# Altium PCB PW_GEN_V2.PcbDoc (part 2 of 2)
Units mm, origin at the board's own origin, x right, y up, seen from the top; angles counter-clockwise.
Board outline 65 x 40.7 mm, 6 copper layers (Top Layer, Layer 2, Layer 3, Layer 4, Layer 5, Bottom Layer), stack 1.548 mm thick; 102 components, 54 nets, 409 pads, 516 vias.
Unrouted connection lines stored in the file: 64.
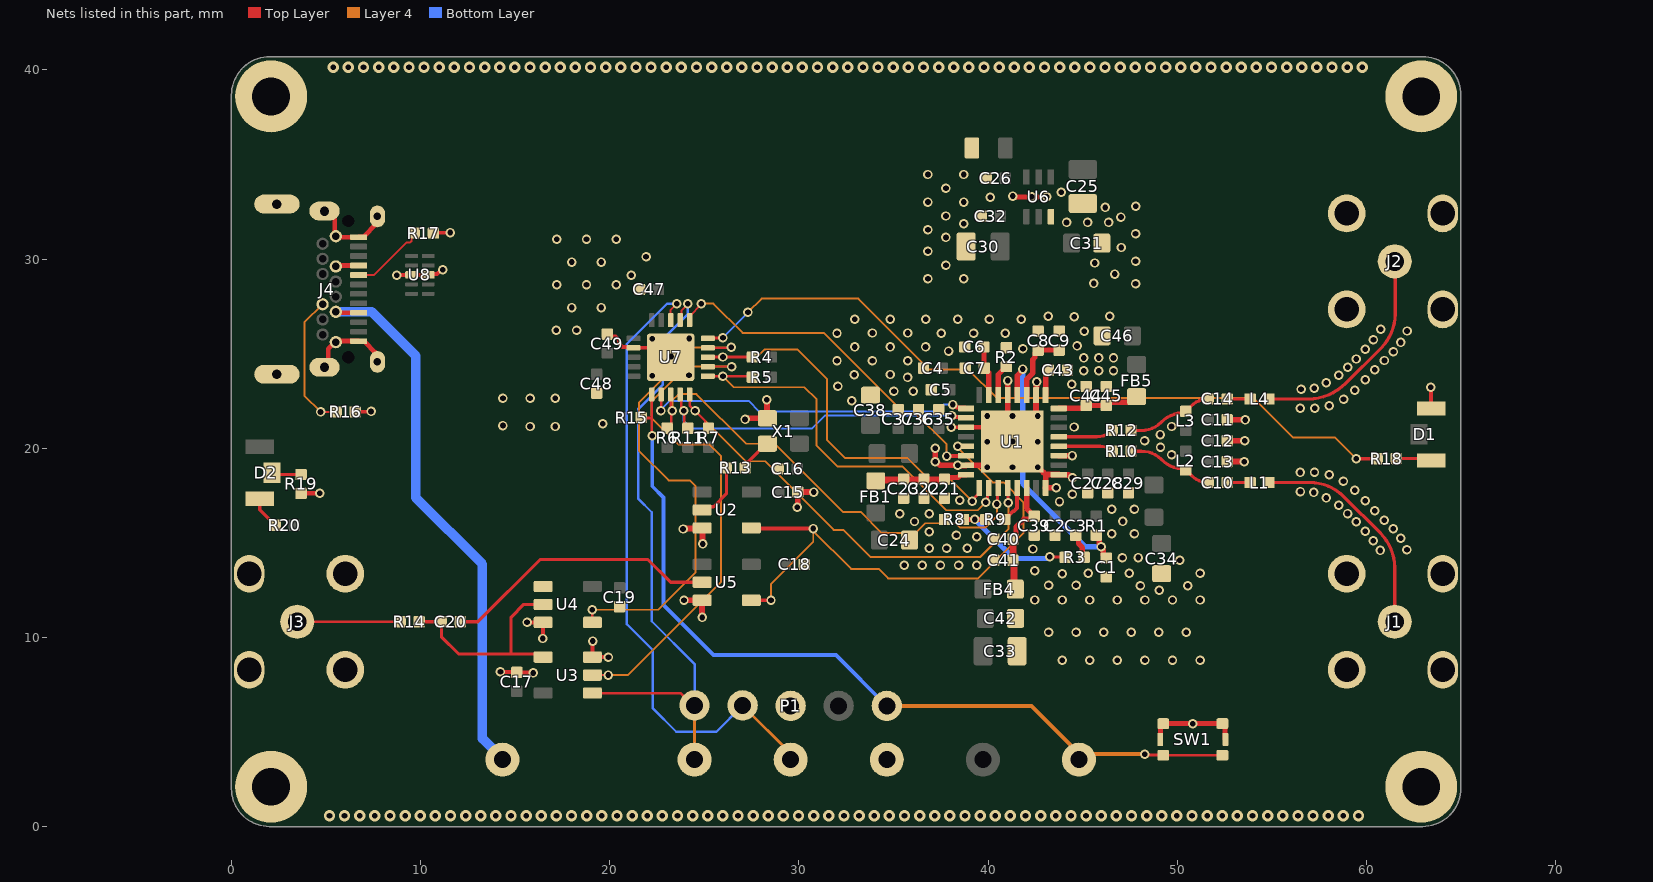
[diagram p6: the nets of this part, all layers, seen from the top]

## Via types
v1: diameter 0.5, hole 0.3, Top Layer to Bottom Layer, 225 vias
v2: diameter 0.5, hole 0.3, Top Layer to Bottom Layer, tented top, 152 vias
v3: diameter 0.6, hole 0.3, Top Layer to Bottom Layer, 138 vias
v4: diameter 0.5, hole 0.3, Top Layer to Bottom Layer, tented both sides, 1 vias

## Nets (pads, with @x,y where several pads share a name; then routed paths per layer and width w, separated by ;. In a path a pad name is that pad's centre, name@x,y a point inside that pad or via, vN(x,y) a via of type N, cw(c..) or ccw(c..) an arc to the next point about the centre after c; other vN are vias at no path point) (continued)
GND: C1.2 C2.2 C4.2 C5.2 C6.2 C7.2 C8.2 C9.2 C11.1 C12.1 C13.1 C15.1 C16.1 C17.1 C18.1 C19.1 C21.2 C22.2 C23.2 C24.2 C25.2 C26.1 C27.2 C28.2 C29.2 C30.2 C31.2 C32.1 C33.2 C34.2 C35.2 C36.2 C37.2 C38.2 C39.2 C40.2 C41.2 C42.2 C43.2 C44.2 C45.2 C46.2 C47.1 C48.1 C49.1 D1.C1 J1.2 J2.2 J3.2 J4.0 J4.A1 J4.A12 J4.B1 J4.B12 P1.3 pad.A5 R2.2 R8.1 R16.2 R17.2 R19.2 SW1.1 SW1.3 T4.1 U1.8 U1.9 U1.11 U1.18 U1.21 U1.27 U1.31 U1.33 U2.3 U3.3 U4.1 U4.3 U5.3 U6.3 U6.7 U7.17 U7.21 U8.3 U8.8 X1.2 | length 63.5
  Top Layer w0.203: R16.2@6.543,21.916 6.555,21.929 7.368,21.929 v1(7.381,21.942) ; v2(8.738,29.138) 8.747,29.148 9.517,29.148 U8.3@9.527,29.158 U8.8@10.401,29.158 10.453,29.21 10.876,29.21 11.094,29.428 v2(11.175,29.428) ; R17.2@10.677,31.375 10.69,31.388 11.562,31.388 v1(11.574,31.4) ; v1(14.224,8.177) 14.238,8.164 15.074,8.164 C17.1@15.088,8.15 ; C17.1@15.1,8.163 15.129,8.135 15.936,8.135 v1(15.951,8.119) ; v1@15.644,10.789 U4.3@16.48,10.789 v1@16.48,9.953 ; v1@19.08,9.792 U3.3@19.08,8.956 v1@19.916,8.956 ; C49.1@19.869,26.032 19.996,25.905 20.3,25.905 20.472,25.732 20.472,25.557 20.675,25.354 21.209,25.354 U7.17@21.257,25.306 22.722,25.306 U7.21@23.222,24.806 ; v2(38.046,21.109) 38.049,21.106 38.835,21.106 U1.27@38.839,21.103 ; U1.33@40.539,21.103 U1.33@41.039,20.603 ; v1(63.399,23.229) 63.424,23.204 D1.C1@63.424,22.101
  Top Layer w0.254: R19.2@3.683,17.61 3.688,17.615 4.669,17.615 v1(4.674,17.62) ; J4.0@4.536,24.278 4.774,24.278 5.119,24.623 5.119,25.261 J4.B1@5.492,25.635 ; J4.0@4.92,32.538 5.019,32.538 5.463,32.094 5.463,31.265 5.577,31.151 J4.A1@6.679,31.151 ; J4.B1@5.52,25.608 5.572,25.66 J4.A12@6.729,25.66 ; J4.A12@6.73,25.658 7.03,25.658 7.053,25.635 7.053,25.616 7.616,25.054 7.616,24.667 J4.0@7.72,24.563 ; J4.A1@6.73,31.158 7.03,31.158 7.053,31.181 7.053,31.241 7.616,31.803 7.616,32.261 J4.0@7.722,32.367 ; U1.27@38.839,21.103 U1.33@40.539,21.103 ; v1(41.3,33.329) 41.3,33.287 U6.7@42.672,33.287 ; SW1.3@49.1,4.602 49.123,4.625 49.123,5.3 SW1.1@49.263,5.439 v2(50.825,5.439) SW1.1@52.388,5.439 52.527,5.3 52.527,4.625 SW1.3@52.55,4.602
  Top Layer w0.305: v1(23.876,15.727) 23.904,15.756 24.856,15.756 U2.3@24.884,15.784 24.901,15.767 24.901,14.956 v1(24.917,14.94) ; v1(23.927,11.968) 23.932,11.963 24.857,11.963 24.877,11.943 24.877,11.069 v1(24.892,11.054) ; v1(27.153,21.518) 27.205,21.518 27.271,21.584 X1.2@28.335,21.584 28.315,21.603 28.315,22.54 v1(28.296,22.56) ; v1(29.921,16.87) 29.939,16.87 C15.1@29.939,17.683 v1(30.785,17.683) ; v1(37.211,19.994) v1(37.211,19.283) 37.264,19.283 37.454,19.093 v2(38.402,19.093) ; v2@38.402,19.075 U1.31@38.836,19.075 ; U1.31@38.836,19.1 U1.31@38.839,19.103 U1.33@40.039,19.103 ; v1(39.958,18.999) 39.958,19.022 U1.33@41.289,20.353 ; v2(41.046,23.574) 41.041,23.569 41.041,22.805 U1.21@41.039,22.803 41.039,20.603 U1.33@41.289,20.353 ; U1.33@42.539,21.603 U1.18@42.539,22.803 v2(42.567,23.503) ; U1.33@42.63,19.008 U1.33@42.63,19.011 ; U1.33@42.635,21.699 U1.33@41.289,20.353 ; U1.8@43.039,17.903 43.039,17.904 43.041,17.906 43.608,17.906 v2(43.612,17.91) ; U1.8@43.044,17.906 43.044,18.557 ; U1.11@43.739,19.603 44.45,19.603 v2(44.45,19.612) ; v2(44.465,18.429) 44.412,18.429 44.241,18.6 43.741,18.6 U1.9@43.739,18.603 43.736,18.605 43.036,18.605 42.929,18.712 U1.33@42.63,19.011 ; C13.1@52.638,19.29 53.537,19.29 v1(53.543,19.283) ; C12.1@52.638,20.395 53.562,20.395 v1(53.569,20.401) ; C11.1@52.638,21.499 53.588,21.499 v1(53.594,21.493) ; U1.33@41.289,20.353 U1.33@42.63,19.011
  other v1: 43.925,8.783 45.381,8.783 46.837,8.783 48.294,8.783 49.75,8.783 51.206,8.783 19.93,8.942 19.094,9.806 16.466,9.939 15.63,10.803 51.206,11.974 43.197,12.751 44.653,12.751 51.206,13.39 37.483,13.812 38.442,13.812 60.732,14.594 62.143,14.638 60.357,15.109 61.811,15.241 59.939,15.609 61.425,15.738 59.462,16.117 47.129,16.126 60.949,16.197 59.005,16.546 60.434,16.691 58.532,16.984 59.934,17.223 57.88,17.369 57.219,17.659 56.515,17.708 59.377,17.773 58.787,18.253 58.036,18.595 56.504,18.718 57.258,18.721 41.294,18.999 42.63,18.999 49.701,19.648 49.117,20.054 39.958,20.349 41.294,20.35 42.63,20.349 48.274,20.387 49.096,20.721 15.788,21.148 17.114,21.148 49.701,21.147 14.354,21.196 39.958,21.699 41.296,21.699 42.63,21.699 56.51,22.115 57.264,22.111 58.042,22.237 58.793,22.579 14.354,22.644 15.788,22.644 17.114,22.644 59.383,23.06 56.547,23.124 57.251,23.173 32.065,23.274 57.886,23.464 59.94,23.61 22.242,23.83 24.192,23.85 58.538,23.849 60.44,24.142 59.011,24.286 32.015,24.625 60.955,24.635 59.468,24.715 23.253,24.849 61.431,25.095 59.945,25.224 61.817,25.591 60.372,25.731 22.242,25.78 24.212,25.801 37.52,26.073 32.015,26.083 33.887,26.09 35.76,26.09 62.149,26.195 17.18,26.234 18.247,26.234 60.755,26.282 32.956,26.811 34.833,26.811 36.709,26.811 38.392,26.811 40.075,26.811 41.758,26.811 44.552,26.954 43.18,26.979 46.431,26.979 17.983,27.436 19.558,27.436 17.196,28.637 18.771,28.637 20.345,28.637 45.593,28.708 47.798,28.697 36.823,28.954 38.709,28.954 21.133,29.138 46.695,29.205 17.983,29.839 19.558,29.839 21.92,30.129 17.196,31.041 18.771,31.041 20.345,31.041 47.798,31.338 47.811,32.796 36.823,33.012 38.709,33.012 42.317,33.289 43.097,33.288 37.773,33.74 36.823,34.469 38.709,34.469
  other v2: 43.197,10.265 44.653,10.265 46.109,10.265 47.566,10.265 49.022,10.265 50.478,10.265 42.469,11.974 43.925,11.974 45.381,11.974 46.837,11.974 48.294,11.974 49.75,11.974 49.045,12.498 48.056,12.735 50.553,12.735 43.925,13.364 45.303,13.39 47.462,13.39 42.469,13.528 35.565,13.812 36.524,13.812 39.4,13.812 50.14,14.076 47.105,14.216 47.943,14.219 42.371,14.67 36.886,14.712 37.807,14.712 38.892,14.712 39.4,15.311 38.328,15.398 46.545,15.48 47.739,15.48 36.886,15.59 36.111,16.124 35.336,16.53 36.886,16.53 46.545,16.772 47.739,16.772 43.776,17.178 38.511,17.241 44.462,17.559 44.545,21.121 19.637,21.297 32.796,22.503 35.026,23.013 36.048,23.005 44.423,23.375 35.743,23.742 32.93,23.875 34.823,23.896 45.058,24.087 45.845,24.087 46.632,24.087 33.887,24.625 35.76,24.625 45.058,24.772 45.845,24.772 46.632,24.772 37.91,25.134 41.843,25.254 32.951,25.354 34.823,25.354 36.696,25.354 44.704,25.405 39.233,26.081 40.916,26.081 45.085,26.179 37.773,29.675 45.642,29.79 47.798,29.881 36.823,30.411 47.039,30.61 37.773,31.14 36.823,31.554 38.709,31.869 44.15,31.935 45.259,31.935 46.369,31.935 47.024,32.219 37.773,32.275 46.188,32.728 40.111,33.274 43.864,33.536
  other v3: 5.182,0.563 5.982,0.563 6.782,0.563 7.582,0.563 8.382,0.563 9.182,0.563 9.982,0.563 10.782,0.563 11.582,0.563 12.382,0.563 13.182,0.563 13.982,0.563 14.782,0.563 15.582,0.563 16.382,0.563 17.182,0.563 17.982,0.563 18.782,0.563 19.582,0.563 20.382,0.563 21.182,0.563 21.982,0.563 22.782,0.563 23.582,0.563 24.382,0.563 25.182,0.563 25.982,0.563 26.782,0.563 27.582,0.563 28.382,0.563 29.182,0.563 29.982,0.563 30.782,0.563 31.582,0.563 32.382,0.563 33.182,0.563 33.982,0.563 34.782,0.563 35.582,0.563 36.382,0.563 37.182,0.563 37.982,0.563 38.782,0.563 39.582,0.563 40.382,0.563 41.182,0.563 41.982,0.563 42.782,0.563 43.582,0.563 44.382,0.563 45.182,0.563 45.982,0.563 46.782,0.563 47.582,0.563 48.382,0.563 49.182,0.563 49.982,0.563 50.782,0.563 51.582,0.563 52.382,0.563 53.182,0.563 53.982,0.563 54.782,0.563 55.582,0.563 56.382,0.563 57.182,0.563 57.982,0.563 58.782,0.563 59.582,0.563 5.385,40.137 6.185,40.137 6.985,40.137 7.785,40.137 8.585,40.137 9.385,40.137 10.185,40.137 10.985,40.137 11.785,40.137 12.585,40.137 13.385,40.137 14.185,40.137 14.985,40.137 15.785,40.137 16.585,40.137 17.385,40.137 18.185,40.137 18.985,40.137 19.785,40.137 20.585,40.137 21.385,40.137 22.185,40.137 22.985,40.137 23.785,40.137 24.585,40.137 25.385,40.137 26.185,40.137 26.985,40.137 27.785,40.137 28.585,40.137 29.385,40.137 30.185,40.137 30.985,40.137 31.785,40.137 32.585,40.137 33.385,40.137 34.185,40.137 34.985,40.137 35.785,40.137 36.585,40.137 37.385,40.137 38.185,40.137 38.985,40.137 39.785,40.137 40.585,40.137 41.385,40.137 42.185,40.137 42.985,40.137 43.785,40.137 44.585,40.137 45.385,40.137 46.185,40.137 46.985,40.137 47.785,40.137 48.585,40.137 49.385,40.137 50.185,40.137 50.985,40.137 51.785,40.137 52.585,40.137 53.385,40.137 54.185,40.137 54.985,40.137 55.785,40.137 56.585,40.137 57.385,40.137 58.185,40.137 58.985,40.137 59.785,40.137
ICSPCLK: P1.5 T2.1 U3.1 U7.12 | length 33.1
  Top Layer w0.102: U7.12@23.722,26.806 23.789,26.873 23.789,27.27 24.129,27.61 v2(24.129,27.641)
  Top Layer w0.127: U3.1@19.08,7.056 19.639,7.056 23.735,7.056 24.385,6.405 P1.5@24.486,6.405
  Layer 4 w0.152: T2.1@24.486,3.535 P1.5@24.486,6.405
  Bottom Layer w0.127: v2(24.129,27.641) 24.129,27.089 22.809,25.768 22.809,23.372 21.514,22.077 21.514,17.323 22.224,16.613 22.224,10.852 24.486,8.59 P1.5@24.486,6.405
ICSPDAT: P1.4 T3.1 U7.13 | length 34.1
  Top Layer w0.102: U7.13@23.222,26.806 23.222,27.318 v2@23.539,27.635
  Layer 4 w0.152: P1.4@27.026,6.405 29.566,3.865 T3.1@29.566,3.535
  Bottom Layer w0.127: v2(23.539,27.641) 23.039,27.641 20.9,25.502 20.9,10.702 22.281,9.321 22.281,6.24 23.513,5.008 25.642,5.008 27.026,6.392 P1.4@27.026,6.405
NetC3_2: C3.2 R3.2 | length 1.4
  Top Layer w0.279: C3.2@44.628,15.404 44.78,15.252 44.78,14.957 44.985,14.752 44.985,14.32 R3.2@45.077,14.227
NetC10_1: C10.1 L1.2 | length 1.2
  Top Layer w0.171: C10.1@52.643,18.185 L1.2@53.853,18.185
NetC10_2: C10.2 L2.2 R10.2 | length 4.6
  Top Layer w0.171: R10.2@47.559,19.844 48.112,19.844 cw(c48.112,18.378) 49.149,19.415 ccw(c50.424,20.69) 50.424,18.887 50.76,18.551 ccw(c51.643,19.433) C10.2@51.643,18.185
NetC14_1: C14.1 L4.2 | length 1.2
  Top Layer w0.171: C14.1@52.643,22.604 L4.2@53.853,22.604
NetC14_2: C14.2 L3.1 R12.2 | length 4.5
  Top Layer w0.171: R12.2@47.559,20.936 48.112,20.936 ccw(c48.112,22.403) 49.149,21.366 cw(c50.424,20.091) L3.1@50.424,21.894 ; L3.1@50.448,21.945 50.728,22.225 cw(c51.643,21.311) C14.2@51.643,22.604
NetC20_1: C20.1 U5.2 | length 14.6
  Top Layer w0.171: C20.1@12.1,10.825 13.03,10.825 16.32,14.115 22.015,14.115 23.222,12.908 U5.2@24.862,12.908
NetC20_2: C20.2 R14.2 U3.4 U4.2 | length 11.7
  Top Layer w0.171: R14.2@9.923,10.825 C20.2@11.1,10.825 11.1,10.038 12.019,9.119 14.757,9.119 14.783,9.144 ; U3.4@16.48,8.956 16.317,9.119 14.808,9.119 14.783,9.144 ; U4.2@16.48,11.739 15.448,11.739 14.783,11.074 14.783,9.144
NetD1_A: D1.A R18.2 | length 2.1
  Top Layer w0.171: R18.2@61.584,19.451 63.324,19.451 D1.A@63.424,19.351
  Top Layer w0.203: D1.A@63.424,19.351 D1.A@63.682,19.351
NetD2_C1: D2.C1 R20.1 | length 1.7
  Top Layer w0.171: D2.C1@1.499,17.324 1.499,16.746 R20.1@2.319,15.926
NetD2_C2: D2.C2 R19.1 | length 1.6
  Top Layer w0.171: D2.C2@2.149,18.699 2.238,18.61 R19.1@3.683,18.61
NetJ1_1: J1.1 L1.1 | length 11.9
  Top Layer w0.171: L1.1@54.853,18.185 57.006,18.185 cw(c57.006,15.645) 58.802,17.441 60.751,15.492 cw(c58.955,13.696) 61.495,13.696 61.495,11.181 J1.1@61.85,10.825
NetJ2_1: J2.1 L4.1 | length 11.7
  Top Layer w0.171: L4.1@54.853,22.604 55.067,22.604 56.924,22.604 ccw(c56.924,25.405) 58.905,23.425 60.776,25.297 ccw(c58.98,27.093) 61.52,27.093 J2.1@61.52,29.875
NetJ3_1: J3.1 R14.1 | length 5.4
  Top Layer w0.127: J3.1@3.556,10.825 R14.1@8.923,10.825
NetJ4_A5: J4.A5 R17.1 | length 4
  Top Layer w0.102: J4.A5@6.73,29.158 7.543,29.158 9.262,30.877 9.456,30.877 9.51,30.931 9.51,31.208 R17.1@9.677,31.375
NetJ4_B5: J4.B5 R16.1 | length 7.3
  Top Layer w0.102: v1(4.714,21.916) R16.1@5.543,21.916
  Layer 4 w0.102: v1(4.714,21.916) 3.861,22.769 3.861,26.648 J4.B5@4.82,27.608
NetR2_1: R2.1 U1.22 | length 1.7
  Top Layer w0.279: U1.22@40.539,22.803 40.539,23.888 R2.1@40.97,24.319
NetR3_1: R3.1 R8.2 R9.1 | length 6.9
  Top Layer w0.152: v2(43.256,14.253) 44.052,14.253 R3.1@44.077,14.227
  Top Layer w0.279: R8.2@38.702,16.234 v2(39.294,16.234) R9.1@39.886,16.234
  Bottom Layer w0.279: v2(39.294,16.234) 41.361,14.166 43.17,14.166 v2(43.256,14.253)
NetR13_1: R13.1 X1.3 | length 1.8
  Top Layer w0.171: R13.1@27.17,18.953 27.338,19.121 27.338,19.307 27.424,19.393 27.424,19.398 28.26,20.234 X1.3@28.335,20.234
PRI_REF: R13.2 U2.2 | length 3
  Top Layer w0.171: U2.2@24.884,16.734 25.057,16.907 25.488,16.907 26.17,17.589 R13.2@26.17,18.953
REFIN: U1.29 U2.4 U5.4 | length 29.1
  Top Layer w0.171: U5.4@27.462,11.958 27.467,11.963 28.519,11.963 v1(28.524,11.968) ; U2.4@27.484,15.753 U2.4@27.484,15.784
  Top Layer w0.203: U2.4@27.484,15.753 v1(30.759,15.753) ; v2@38.405,20.106 38.835,20.106 U1.29@38.839,20.103
  Layer 4 w0.102: v1(28.524,11.968) 28.524,12.806 30.759,15.041 v1@30.759,15.62 ; v1@30.627,15.753 v1@30.759,15.62 ; v2(38.405,20.096) 38.405,20.031 40.245,18.191 40.818,18.191 41.885,17.124 41.885,15.534 39.471,13.121 34.712,13.121 34.214,13.619 32.761,13.619 v1@30.759,15.62
RF_CE: R7.1 U1.4 U7.5 | length 24.7
  Top Layer w0.127: U7.5@24.222,22.806 24.222,22.264 v1(24.511,21.976) 25.038,21.449 25.038,21.238 R7.1@25.222,21.053
  Top Layer w0.152: U1.4@41.039,17.903 41.055,17.886 41.055,17.141 v2(41.072,17.124)
  Layer 4 w0.102: v1(24.511,21.976) 27.178,19.309 28.209,19.309 31.836,15.681 32.35,15.681 33.775,14.256 39.6,14.256 41.072,15.727 v2(41.072,17.124)
RF_CLK: R4.1 U1.1 U7.8 | length 21.7
  Top Layer w0.152: U7.8@25.222,24.806 25.229,24.813 v1@25.977,24.813 ; v1(25.984,24.821) R4.1@27.542,24.82 ; v2@39.167,17.25 39.167,17.256 39.539,17.628 U1.1@39.539,17.903
  Layer 4 w0.102: v1(25.984,24.821) 27.788,24.821 28.178,25.211 29.935,25.211 31.496,23.65 31.496,20.42 32.429,19.486 35.738,19.486 36.805,18.42 37.946,18.42 v2(39.167,17.199)
RF_LE: R6.1 U1.3 U7.3 | length 24.8
  Top Layer w0.127: R6.1@23.038,21.053 23.242,21.258 23.242,21.909 v1(23.309,21.976) ; v1@23.222,21.976 U7.3@23.222,22.806
  Top Layer w0.152: v2(40.463,17.046) 40.501,17.084 40.501,17.865 U1.3@40.539,17.903
  Layer 4 w0.102: v1(23.309,21.976) 23.309,22.526 23.647,22.865 24.586,22.865 27.215,20.235 28.713,20.235 32.317,16.631 33.259,16.631 34.366,15.524 36.17,15.524 36.678,16.032 38.29,16.032 38.519,15.803 39.86,15.803 40.463,16.406 v2(40.463,17.046)
RF_LOCK: U1.25 U7.2 | length 17.7
  Top Layer w0.127: v1(22.708,21.976) 22.722,21.976 U7.2@22.722,22.806
  Top Layer w0.203: v2(38.125,22.306) 38.197,22.306 38.351,22.151 38.79,22.151 U1.25@38.839,22.103
  Bottom Layer w0.102: v1(22.708,21.976) 22.708,22.034 23.171,22.498 27.337,22.498 27.904,21.931 37.272,21.931 37.647,22.306 v2(38.125,22.306)
RF_MUXOUT: U1.30 U7.11 | length 18.8
  Top Layer w0.102: U7.11@24.222,26.771 24.222,26.987 24.841,27.606 v2(24.841,27.641)
  Top Layer w0.203: v1(37.812,19.585) 37.821,19.594 38.83,19.594 U1.30@38.839,19.603
  Layer 4 w0.102: v2(24.841,27.641) 25.475,27.641 27.026,26.09 31.327,26.09 35.561,21.856 36.163,21.856 37.812,20.206 v1(37.812,19.585)
RF_PDBRF: R11.2 U1.26 U7.4 | length 18
  Top Layer w0.127: U7.4@23.722,22.806 23.774,22.806 23.774,21.95 v1@23.887,21.951 ; v1(23.91,21.976) 23.932,21.954 23.932,21.252 R11.2@24.13,21.053
  Top Layer w0.203: v2(38.074,21.709) 38.154,21.709 38.213,21.651 38.79,21.651 U1.26@38.839,21.603
  Bottom Layer w0.102: v1(23.91,21.976) 23.91,21.442 24.321,21.031 30.692,21.031 31.394,21.733 38.05,21.733 v2(38.074,21.709)
RF_SDO: R5.1 U1.2 U7.6 | length 21.6
  Top Layer w0.127: U7.6@25.222,23.806 v1@25.957,23.806 ; v1(25.984,23.806) 27.489,23.806 R5.1@27.542,23.754
  Top Layer w0.152: v2@39.878,17.123 39.878,17.217 39.965,17.304 39.965,17.829 U1.2@40.039,17.903
  Layer 4 w0.102: v1(25.984,23.806) 26.568,23.223 30.291,23.223 30.937,22.576 30.937,20.133 32.049,19.021 35.492,19.021 37.795,16.718 39.453,16.718 v2(39.873,17.138)
RFOUTA+: R10.1 U1.12 | length 2.9
  Top Layer w0.171: U1.12@43.739,20.103 45.935,20.103 cw(c45.935,19.221) R10.1@46.559,19.844
RFOUTA-: R12.1 U1.13 | length 2.9
  Top Layer w0.171: U1.13@43.739,20.603 45.753,20.603 ccw(c45.753,21.742) R12.1@46.559,20.936
SDVDD: C21.1 C22.1 C23.1 FB1.2 U1.32 | length 5
  Top Layer w0.279: C21.1@37.694,18.359 37.786,18.452 38.413,18.452 38.553,18.592 38.828,18.592 U1.32@38.839,18.603
  Top Layer w0.381: FB1.2@34.061,18.278 34.087,18.278 34.112,18.278 34.138,18.278 34.163,18.278 34.188,18.278 34.214,18.278 34.239,18.278 34.265,18.278 34.29,18.278 34.331,18.319 C23.1@35.535,18.319 ; C23.1@35.535,18.359 C23.1@35.535,18.319 ; C21.1@37.694,18.359 37.653,18.319 36.614,18.319 C23.1@35.535,18.319
STATUS_LED: R18.1 U7.10 | length 39.8
  Top Layer w0.102: v2(25.984,25.836) v2@26.004,25.856
  Top Layer w0.152: U7.10@25.222,25.806 25.237,25.821 v2@25.969,25.821
  Top Layer w0.171: v1(59.467,19.438) 59.474,19.444 60.577,19.444 R18.1@60.584,19.451
  Layer 4 w0.102: v2(25.984,25.836) v2@26.005,25.857 ; v1(27.305,27.183) 28.03,27.907 33.151,27.907 36.903,24.155 38.964,24.155 40.462,22.657 54.026,22.657 56.109,20.574 58.331,20.574 v1(59.467,19.438)
  Bottom Layer w0.102: v2(25.984,25.836) 27.305,27.157 v1(27.305,27.183)
SW: R9.2 U1.5 | length 2
  Top Layer w0.203: R9.2@40.886,16.234 41.315,16.663 41.364,16.663 41.539,16.838 U1.5@41.539,17.903
SYNC_IN: U4.4 U7.9 | length 25.1
  Top Layer w0.102: U7.9@25.222,25.306 25.224,25.304 26.415,25.304 v1@26.416,25.303
  Top Layer w0.127: v1(19.075,11.46) 19.075,10.794 U4.4@19.08,10.789
  Layer 4 w0.102: v1(19.075,11.46) 22.56,11.46 24.536,13.437 24.536,17.988 24.232,18.293 23.107,18.293 21.55,19.849 21.55,22.418 24.461,25.329 v1(26.416,25.329)
SYNC_OUT: U3.2 U7.7 | length 27.1
  Top Layer w0.102: U3.2@19.08,8.006 v1(19.914,8.006) ; U7.7@25.222,24.306 25.238,24.322 26.425,24.322 v1@26.441,24.338
  Layer 4 w0.102: v1(19.914,8.006) 20.955,8.006 25.883,12.933 25.883,19.563 25.248,20.198 23.622,20.198 22.2,21.62 22.2,22.458 24.054,24.312 v1(26.441,24.314) v1(26.441,24.314)
TEMP: C8.1 C9.1 U1.19 | length 3.8
  Top Layer w0.279: U1.19@42.039,22.803 42.049,22.813 42.049,23.663 42.367,23.981 42.367,24.692 42.486,24.811 42.486,25.022 42.659,25.195 43.746,25.195 C9.1@43.759,25.183
VBUS: F1.1 J4.A4 J4.A9 J4.B4 J4.B9 T1.1 | length 31.3
  Top Layer w0.254: J4.B9@5.473,29.62 5.512,29.659 J4.A4@6.73,29.658 ; J4.B4@5.52,27.208 5.565,27.163 J4.A9@7.048,27.163
  Bottom Layer w0.508: J4.B4@5.52,27.208 7.421,27.208 9.754,24.875 9.754,17.378 13.263,13.869 13.263,4.645 14.326,3.582 T1.1@14.326,3.535
VCCO: C43.1 C44.1 C45.1 FB5.2 U1.16 U1.17 | length 5.8
  Top Layer w0.279: U1.17@43.039,22.803 43.049,22.813 43.049,23.97 C43.1@43.199,24.12 ; U1.16@43.739,22.103 43.749,22.113 45.038,22.113 C44.1@45.187,22.262 C45.1@46.253,22.262 46.414,22.422 47.551,22.422 FB5.2@47.854,22.724
VCOM: C6.1 C7.1 U1.23 | length 2.7
  Top Layer w0.279: C6.1@39.768,25.352 39.781,25.34 39.781,24.248 C7.1@39.794,24.235 40.039,23.99 U1.23@40.039,22.803
VP: C39.1 C40.1 C41.1 FB4.2 U1.6 | length 6.3
  Top Layer w0.279: C41.1@41.318,14.075 C41.1@41.378,14.014 ; C40.1@41.318,15.192 41.478,15.353 41.478,15.827 41.894,16.243 42.283,16.243 C39.1@42.443,16.404 42.039,16.808 U1.6@42.039,17.903
  Top Layer w0.381: C41.1@41.318,14.075 C40.1@41.318,15.192 ; C41.1@41.378,14.014 41.378,12.612 FB4.2@41.439,12.551
VTUNE: C1.1 R1.2 U1.20 | length 14.5
  Top Layer w0.279: U1.20@41.539,22.803 41.539,23.831 41.834,24.126 v1(41.834,24.185) ; R1.2@45.72,15.404 45.88,15.243 45.88,14.939 45.974,14.846 v4(45.974,14.786) 45.974,14.726 46.093,14.607 46.093,14.354 C1.1@46.253,14.194
  Bottom Layer w0.279: v1(41.834,24.185) 41.834,18.177 41.861,18.15 41.861,18.087 45.161,14.786 v4(45.974,14.786)
~MCLR: P1.1 R15.1 SW1.2 T6.1 U7.1 | length 45.4
  Top Layer w0.152: R15.1@21.658,21.62 21.684,21.595 22.222,21.595 ; U7.1@22.222,22.806 22.222,21.595 ; v1(22.248,20.655) 22.222,20.681 22.222,21.595 ; v1(48.286,3.813) 48.31,3.789 49.239,3.789 SW1.2@49.263,3.765 52.152,3.765 52.172,3.746 52.172,3.637 52.3,3.765 SW1.2@52.388,3.765
  Layer 4 w0.203: P1.1@34.646,6.38 42.291,6.38 44.806,3.865 T6.1@44.806,3.535 45.11,3.839 48.26,3.839 v1(48.286,3.813)
  Bottom Layer w0.203: v1(22.248,20.655) 22.248,17.986 22.835,17.399 22.835,11.709 25.476,9.068 31.958,9.068 P1.1@34.646,6.38
pads on no net: C1.0 C2.0 C3.0 C4.0 C5.0 C6.0 C7.0 C8.0 C9.0 C10.0 C11.0 C12.0 C13.0 C14.0 C15.0 C16.0 C17.0 C18.0 C19.0 C20.0 C21.0 C22.0 C23.0 C24.0 C25.0 C26.0 C27.0 C28.0 C29.0 C30.0 C31.0 C32.0 C33.0 C34.0 C35.0 C36.0 C37.0 C38.0 C39.0 C40.0 C41.0 C42.0 C43.0 C44.0 C45.0 C46.0 C47.0 C48.0 C49.0 D1.C2 FB1.0 FB2.0 FB3.0 FB4.0 FB5.0 J4.1 J4.A2 J4.A3 J4.A8 J4.A10 J4.A11 J4.B2 J4.B3 J4.B8 J4.B10 J4.B11 L1.0 L2.0 L3.0 L4.0 R1.0 R2.0 R3.0 R4.0 R5.0 R6.0 R7.0 R8.0 R9.0 R10.0 R11.0 R12.0 R13.0 R14.0 R15.0 R16.0 R17.0 R18.0 R19.0 R20.0 U1.14 U1.15 U2.0 U3.0 U4.0 U5.0 U6.2 U6.5 U8.1 U8.2 U8.9 U8.10

## Polygon pours and split planes (outlines as drawn)
GND on Top Layer "Top Layer-GND" (solid, pour order 66): 61.519,29.388 61.519,27.113 cw(c58.979,27.112) 60.775,25.316 58.808,23.35 cw(c57.012,25.146) 57.012,22.606 56.693,22.606 52.347,22.606 52.342,22.128 52.138,22.128 52.138,18.75 52.335,18.75 52.356,18.185 57.006,18.185 cw(c57.006,15.645) 58.802,17.441 60.751,15.492 cw(c59.02,13.761) 61.468,13.761 61.468,11.709 61.68,11.497 ccw(c62.027,11.844) 62.027,11.354 62.165,11.492 ccw(c61.211,12.446) 62.56,12.446 ccw(c62.499,12.507) 62.586,12.507 62.586,14.427 ccw(c60.746,14.427) 62.047,15.728 59.367,18.408 ccw(c57.571,16.612) 57.571,19.152 55.042,19.152 55.042,21.59 57.546,21.59 ccw(c57.546,24.13) 59.342,22.334 62.044,25.036 ccw(c60.613,26.467) 62.636,26.467 cw(c63.25,26.467) 62.816,26.9 63.017,27.102 63.017,29.388
GND on Top Layer "NONET_L01_P-001" (solid, pour order 61): 47.559,20.936 48.112,20.936 ccw(c48.112,22.403) 49.149,21.366 cw(c50.424,20.091) 50.424,21.894 50.424,18.887 cw(c50.424,20.69) 49.149,19.415 ccw(c48.112,18.378) 48.112,19.844 47.559,19.844
GND on Top Layer "NONET_L01_P-001" (solid, pour order 60): 57.065,18.16 cw(c57.065,15.704) 58.802,17.441 60.751,15.492 cw(c58.955,13.696) 61.495,13.696 61.495,11.795 ccw(c61.765,11.795) 61.574,11.603 61.052,11.082 ccw(c61.261,10.873) 60.966,10.873 ccw(c60.881,10.669) 60.881,10.89 60.123,10.89 60.123,13.656 ccw(c58.215,13.656) 59.564,15.005 57.819,16.75 ccw(c56.023,14.954) 56.023,17.494 51.989,17.494 cw(c51.792,19.703) 50.369,18.002 cw(c50.566,19.826) 49.137,18.675 48.896,18.916 ccw(c48.283,18.303) 48.283,19.17 44.474,19.17 cw(c44.474,19.777) 44.045,19.348 44.045,20.135 45.855,20.135 cw(c45.855,19.355) 46.407,19.907 ccw(c47.143,20.643) 47.143,19.602 47.601,19.602 ccw(c47.601,19.747) 47.703,19.644 47.887,19.828 48.164,19.828 cw(c48.164,18.362) 49.201,19.399 ccw(c50.476,20.674) 50.476,18.871 50.826,18.52 ccw(c51.695,19.389) 51.695,18.16
GND on Top Layer "NONET_L01_P-001" (solid, pour order 59): 56.693,22.608 57.015,22.608 ccw(c57.015,25.148) 58.811,23.352 60.776,25.318 ccw(c58.98,27.114) 61.52,27.114 61.52,29.728 ccw(c60.995,29.728) 61.366,30.099 61.215,29.948 cw(c61.036,30.127) 61.036,29.874 60.161,28.999 ccw(c60.379,28.781) 60.071,28.781 60.071,26.664 cw(c59.239,26.664) 59.827,26.075 57.767,24.015 cw(c55.971,25.811) 55.971,23.271 51.937,23.271 ccw(c51.74,21.062) 50.317,22.763 ccw(c50.514,20.939) 49.085,22.09 48.844,21.849 cw(c48.231,22.462) 48.231,21.595 44.422,21.595 ccw(c44.422,20.988) 43.993,21.417 43.993,20.629 45.803,20.629 ccw(c45.803,21.41) 46.355,20.858 cw(c47.091,20.122) 47.091,21.163 47.549,21.163 cw(c47.549,21.018) 47.651,21.12 47.835,20.936 48.112,20.936 ccw(c48.112,22.403) 49.149,21.366 cw(c50.424,20.091) 50.424,21.894 50.775,22.245 cw(c51.643,21.376) 51.643,22.604 56.553,22.604 ccw(c56.553,25.143)
GND on Top Layer "Top Layer-GND 1" (solid, pour order 57): 43.628,23.641 44.507,22.762 46.99,22.762 46.99,25.048 46.812,25.048 46.812,27.31 31.572,27.31 31.572,22.153 34.671,22.153 34.671,21.666 37.76,21.666 37.739,21.742 37.973,21.742 37.973,22.661 37.44,22.661 37.44,23.55 39.248,23.55 39.248,25.396 40.361,25.396 40.361,24.857 42.164,24.857 42.164,25.746 44.399,25.746 44.399,24.743 43.628,24.743
3V3 on Top Layer "NONET_L01_P-001" (solid, pour order 55): 31.572,17.886 29.413,17.886 29.413,20.782 31.572,20.782 31.572,21.645 34.773,21.645 34.773,18.953 33.706,18.953 33.706,17.302 35.001,17.302 35.001,13.416 40.538,13.416 40.538,8.306 31.572,8.306
GND on Top Layer "Top Layer-GND 2" (solid, pour order 54): 40.742,8.306 51.587,8.306 51.587,14.279 48.235,14.279 48.235,17.504 48.036,17.504 48.036,18.075 44.788,18.075 44.788,18.774 43.307,18.774 43.307,18.317 42.951,18.317 42.799,18.164 42.799,17.275 43.256,16.818 46.253,16.818 46.253,14.837 46.813,14.837 46.813,13.694 44.552,13.694 43.561,13.694 43.561,14.761 44.094,14.761 44.094,15.834 41.995,15.834 41.996,15.795 42.032,15.795 42.032,11.89 40.742,11.89
VCCO on Top Layer "NONET_L01_P-001" (solid, pour order 50): 48.146,21.593 49.047,22.495 49.047,23.397 47.411,23.397 46.547,22.533 44.475,22.533 44.475,22.794 43.589,23.68 43.589,24.47 43.009,24.47 42.901,24.362 42.901,23.524 42.774,23.397 42.774,22.254 43.078,22.025 43.078,21.593
VP on Top Layer "NONET_L01_P-001" (solid, pour order 46): 41.783,17.859 42.266,17.859 42.266,17.301 42.99,16.577 42.99,16.159 41.978,16.159 41.91,16.227 41.91,13.592 42.037,13.465 42.037,11.916 40.804,11.916 40.804,13.542 40.908,13.542 40.908,16 41.539,16.631 41.539,17.37
3V3 on Top Layer "NONET_L01_P-001" (solid, pour order 21): 22.645,27.473 24.79,27.473 24.79,31.323 22.504,31.323 22.504,27.462
GND on Top Layer "NONET_L01_P-001" (solid, pour order 20): 16.891,31.323 22.377,31.323 22.377,27.208 20.676,27.208 20.676,24.998 16.891,24.998 16.891,26.471
GND on Top Layer "NONET_L01_P-001" (solid, pour order 68): 64.466,13.553 64.466,7.889 58.548,7.889 58.548,13.553
GND on Top Layer "NONET_L01_P-001" (solid, pour order 67): 58.536,27.042 58.536,32.706 64.455,32.706 64.455,27.042
VBUS on Top Layer "NONET_L01_P-001" (solid, pour order 18): 8.255,25.049 8.255,21.391 13.284,21.391 13.284,25.151 16.764,25.151 16.764,34.777 36.068,34.777 36.068,34.955 39.903,34.955 39.903,38.333 5.588,38.333 5.588,29.565 5.761,29.392 7.65,29.392 9.119,30.861 9.119,32.085 9.423,32.39 11.455,32.39 11.862,31.983 11.862,27.995 11.316,27.449 8.547,27.449 8.357,27.64 5.469,27.64 5.037,27.208 5.037,26.895 5.283,26.649 6.833,26.649 6.833,26.471
3V3 on Top Layer "NONET_L01_P-001" (solid, pour order 72): 48.133,16.997 49.987,16.997 50.571,16.413 52.984,16.413 52.984,14.254 48.133,14.254 48.133,16.87
3V3 on Top Layer "NONET_L01_P-001" (solid, pour order 70): 40.132,32.694 40.132,32.824 42.342,32.824 42.342,31.475 45.208,31.475 45.208,28.427 39.954,28.427 39.954,31.602 40.132,31.602
+5V on Top Layer "NONET_L01_P-001" (solid, pour order 8): 47.295,33.71 47.295,38.282 40.234,38.282 40.234,33.939 41.91,33.939 41.91,34.091 45.898,34.083 45.898,33.71
GND on Top Layer "NONET_L01_P-001" (solid, pour order 69): 36.068,34.955 40.374,34.955 40.374,33.761 47.295,33.761 47.295,33.075 48.108,33.075 48.108,28.427 45.263,28.427 45.263,31.551 42.875,31.551 42.875,32.694 40.132,32.694 40.132,31.602 39.726,31.602 39.726,28.427 36.068,28.427 36.068,34.866
3V3 on Top Layer "NONET_L01_P-001" (solid, pour order 19): 18.466,23.525 18.466,23.068 13.995,23.068 13.995,24.998 20.676,24.998 20.676,23.525
3V3 on Top Layer "NONET_L01_P-001" (solid, pour order 58): 46.968,27.308 51.206,27.308 51.206,23.627 46.99,23.627 46.99,27.31 46.969,27.31
GND on Top Layer "NONET_L01_P-001" (solid, pour order 47): 38.887,17.835 38.887,16.767 38.202,16.767 38.202,15.7 40.818,15.7 40.818,13.44 35.103,13.44 35.103,15.802 35.035,15.802 35.035,17.835
GND on Top Layer "NONET_L01_P-001" (solid, pour order 38): 1.942,-0.086 cw(c1.942,1.87) -0.014,1.87 -0.014,2.411 64.985,2.411 64.985,1.921 cw(c62.978,1.921) 62.978,-0.086
GND on Top Layer "NONET_L01_P-001" (solid, pour order 39): 63.031,40.811 cw(c63.031,38.855) 64.987,38.855 64.987,38.315 -0.011,38.315 -0.011,38.804 cw(c1.995,38.804) 1.995,40.811
GND on Top Layer "NONET_L01_P-001" (solid, pour order 26): 18.466,23.068 18.466,23.525 20.371,23.525 20.371,20.833 13.995,20.833 13.995,23.068
no net on Top Overlay "NONET_L01_P-001" (solid): 8.272,26.421 13.267,26.421 13.267,21.417 8.272,21.417 8.272,26.243
GND on Layer 5 "NONET_L01_P-001" (solid, pour order 25): 64.993,20.68 64.993,29.534 64.993,38.765 ccw(c62.961,38.765) 62.961,40.797 2.026,40.797 ccw(c2.026,38.765) -0.006,38.765 -0.006,1.91 ccw(c2.001,1.91) 2.001,-0.097 63.012,-0.097 ccw(c63.012,1.884) 64.993,1.884
no net on Top Solder "NONET_L01_P-001" (solid): 59.857,1.949 64.988,1.949 64.988,1.924 cw(c62.956,1.924) 62.956,-0.108 2.021,-0.108 cw(c2.021,1.924) -0.011,1.924
no net on Top Solder "NONET_L01_P-001" (solid): 5.131,38.74 0,38.74 0,38.765 cw(c2.032,38.765) 2.032,40.797 62.967,40.797 cw(c62.967,38.765) 64.999,38.765
no net on Bottom Solder "NONET_L01_P-001" (solid): 5.142,38.751 0.011,38.751 0.011,38.776 cw(c2.043,38.776) 2.043,40.808 62.978,40.808 cw(c62.978,38.776) 65.01,38.776
no net on Bottom Solder "NONET_L01_P-001" (solid): 59.857,1.949 64.988,1.949 64.988,1.924 cw(c62.956,1.924) 62.956,-0.108 2.021,-0.108 cw(c2.021,1.924) -0.011,1.924
GND on Layer 2 "NONET_L01_P-001" (solid, pour order 23): 64.993,20.579 64.993,29.476 64.993,38.74 ccw(c62.961,38.74) 62.961,40.772 2.026,40.772 ccw(c2.026,38.74) -0.006,38.74 -0.006,1.884 ccw(c2.001,1.884) 2.001,-0.122 63.012,-0.122 ccw(c63.012,1.859) 64.993,1.859
GND on Bottom Layer "NONET_L01_P-001" (solid, pour order 43): 64.993,20.481 64.993,29.688 64.993,38.765 ccw(c62.961,38.765) 62.961,40.797 2.026,40.797 ccw(c2.026,38.765) -0.006,38.765 -0.006,1.91 ccw(c2.001,1.91) 2.001,-0.097 63.012,-0.097 ccw(c63.012,1.884) 64.993,1.884
3V3 on Layer 3 "NONET_L01_P-001" (solid, pour order 24): 64.996,20.68 64.996,29.52 64.996,38.816 ccw(c62.989,38.816) 62.989,40.822 2.131,40.822 ccw(c2.131,38.689) -0.003,38.689 -0.003,1.935 ccw(c2.029,1.935) 2.029,-0.097 63.04,-0.097 ccw(c63.04,1.859) 64.996,1.859
3V3 on Layer 4 "NONET_L01_P-001" (solid, pour order 44): 64.993,20.658 64.993,29.551 64.993,38.765 ccw(c62.961,38.765) 62.961,40.797 2.026,40.797 ccw(c2.026,38.765) -0.006,38.765 -0.006,1.91 ccw(c2.001,1.91) 2.001,-0.097 63.012,-0.097 ccw(c63.012,1.884) 64.993,1.884

## Keep-outs
Keep-Out Layer:
  lines w0.1: 0,2.007 ccw(c2.007,2.007) 2.007,0 62.975,0 ccw(c62.975,2.025) 65,2.025 64.998,2.025 64.998,38.662 ccw(c62.96,38.662) 62.96,40.7 2.038,40.7 ccw(c2.038,38.662) 0,38.662 0,2.007 ; 65,20.655 65,20.655

## Other copper
Top Layer:
  region: 3410 vertices and 1 holes, not listed, extent 5.661,16.842 9.962,19.663
  text "RF OUT" at 54.141,34.148 h3
  text "RFGEN44" at 10.576,18.537 h1.78
  text "Rev E 3025" at 10.62,16.919 h1.78
  text "www.CircuitValley.com" at 5.724,15.392 h1.78
  text "RF OUT" at 53.709,4.379 h3
Layer 4:
  pour cut-out: 12.725,26.878 10.312,26.878 9.322,27.868 9.322,29.469 9.982,30.129 12.852,30.129 16.611,26.37 18.796,26.37 20.447,28.021 22.225,28.021 22.987,27.259 22.987,24.871 22.53,24.414 15.088,24.414 13.538,25.963

## Silkscreen, mask and mechanical layers (free items; w line width, h text height)
Top Overlay:
  drawing of 26 lines, arcs and shapes, not listed
  text "(C) CircuitValley.com" at 17.549,36.171 h2
  text "CLK" at 23.444,7.844 h1.14
  text "DAT" at 26.126,7.83 h1.14
  text "GND" at 28.474,7.818 h1.14
  text "3V3" at 31.246,7.827 h1.14
  text "Reset" at 49.063,6.308 h1.52
  text "~MCLR" at 36.199,6.036 h1.14
  text "SYNC / REF IN / OUT" at 0.657,5.507 h1.14
  text "~MCLR" at 43.031,5.151 h1.14
  text "CLK" at 25.705,3.17 h1.14
  text "GND" at 35.97,3.17 h1.14
  text "3V3" at 41.168,3.17 h1.14
  text "DAT" at 30.801,3.157 h1.14
  text "VBUS" at 15.576,3.119 h1.14
Top Solder:
  drawing of 27 lines, arcs and shapes, not listed
  text "RF OUT" at 54.141,34.148 h3
  text "RFGEN44" at 10.576,18.537 h1.78
  text "Rev E 3025" at 10.62,16.919 h1.78
  text "www.CircuitValley.com" at 5.724,15.392 h1.78
  text "RF OUT" at 53.709,4.379 h3
Bottom Solder:
  region: 3410 vertices and 1 holes, not listed, extent 54.415,34.976 58.716,37.797
  text "www.CircuitValley.com" at 53.633,36.45 h2.3
  text "Rev E 3025" at 17.005,36.361 h2.3
  text "RFGEN44" at 28.723,36.278 h2.3